# EAGLE board fuitsu (EAGLE 6.5.0)
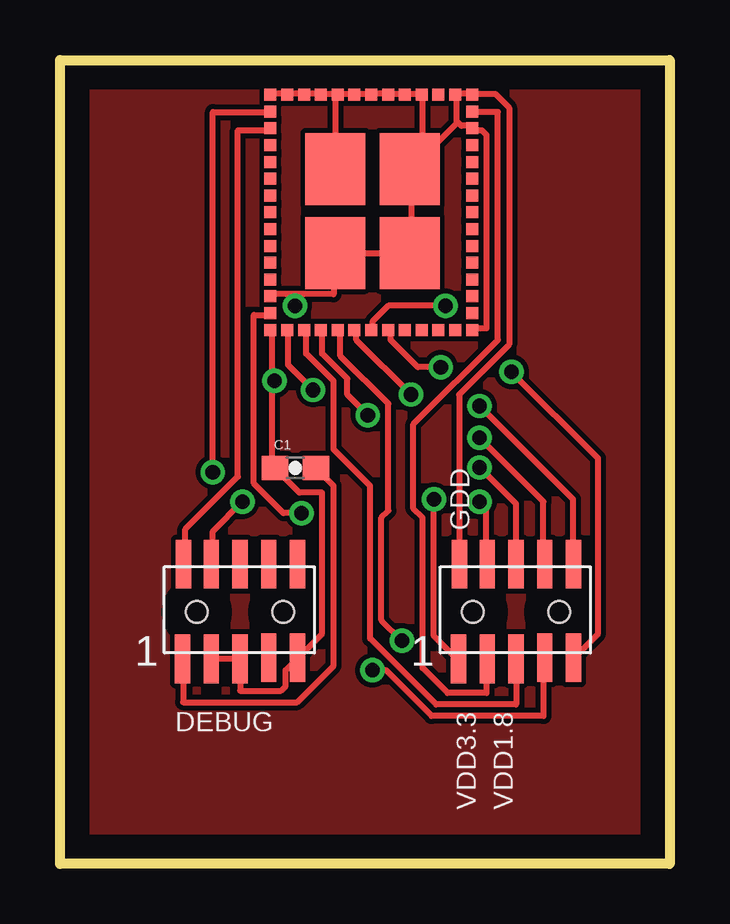
[diagram p0: board, top side]
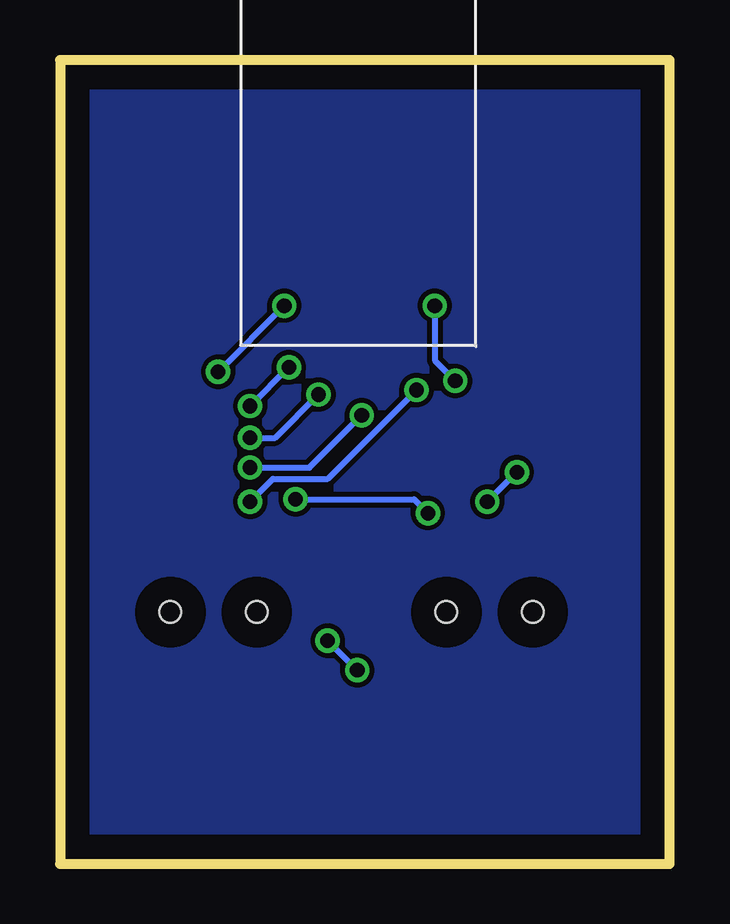
[diagram p1: board, bottom side, seen from below]

Size 25.4 x 33.52 mm. Coordinates in mm from the lower left corner, seen from the top.
Outline: 0,33.52 25.4,33.52 25.4,0 0,0 0,33.52
Copper layers (1*16): Top 0.035mm / dielectric 1.5mm / Bottom 0.035mm
Design rules "default": minimum track width 10mil, minimum drill 24mil, track to track 8mil, track to pad 8mil, pad to pad 8mil, via to via 8mil, smd to smd 8mil, copper to edge 40mil, drill to drill 8mil, minimum pad ring 10mil, minimum via ring 8mil, stop-mask expansion 4mil, vias tented up to drill 0mil, thermal gap 10mil

## Footprints (pad centres in the part's own frame; a part is rotated, then mirrored left to right if it is on the bottom)
0603-CAP = smd 1.1 x 1: 1 -0.85,0; 2 0.85,0
FUJITSU-MBH7BLZ02 = smd 0.5 x 0.5: 1 4.9,-4.2; 2 4.2,-4.2; 3 3.5,-4.2; 4 2.8,-4.2; 5 2.1,-4.2; 6 1.4,-4.2; 7 0.7,-4.2; 8 0,-4.2; 9 -0.7,-4.2; 10 -1.4,-4.2; 11 -2.1,-4.2; 12 -2.8,-4.2; 13 -3.5,-4.2; 14 -4.2,-4.2; 15 -4.9,-4.2; 16 -4.9,-3.5; 17 -4.9,-2.8; 18 -4.9,-2.1; 19 -4.9,-1.4; 20 -4.9,-0.7; 21 -4.9,0; 22 -4.9,0.7; 23 -4.9,1.4; 24 -4.9,2.1; 25 -4.9,2.8; 26 -4.9,3.5; 27 -4.9,4.2; 28 -4.2,4.2; 29 -3.5,4.2; 30 -2.8,4.2; 31 -2.1,4.2; 32 -1.4,4.2; 33 -0.7,4.2; 34 0,4.2; 35 0.7,4.2; 36 1.4,4.2; 37 2.1,4.2; 38 2.8,4.2; 39 3.5,4.2; 40 4.2,4.2; 41 4.9,4.2; 42 4.9,3.5; 43 4.9,2.8; 44 4.9,2.1; 45 4.9,1.4; 46 4.9,0.7; 47 4.9,0; 48 4.9,-0.7; 49 4.9,-1.4; 50 4.9,-2.1; 51 4.9,-2.8; 52 4.9,-3.5 | smd 3 x 2.5: 53 1.8,-1.6; 54 -1.7,-1.6; 55 1.8,1.5; 56 -1.7,1.5
PIN-HEADER-SMT(1.27MM)2X5 = smd 0.635 x 2.032: 1 -2.4,-1.95; 2 -2.35,2; 3 -1.2,-1.95; 4 -1.2,2; 5 0,-1.95; 6 0,2; 7 1.2,-1.9; 8 1.2,2; 9 2.4,-1.9; 10 2.4,2 | hole 0.9: 1.8,0; -1.8,0

## Placement (x,y rotation side)
C1  10μ  [0603-CAP]  9.81,16.51 0 top
U$1  FUJITSU-MBH7BLZ02  [FUJITSU-MBH7BLZ02]  12.97,27.17 90 top
U$2  PIN-HEADER-SMT(1.27MM)2X5  [PIN-HEADER-SMT(1.27MM)2X5]  7.5,10.5 0 top
U$3  PIN-HEADER-SMT(1.27MM)2X5  [PIN-HEADER-SMT(1.27MM)2X5]  19,10.5 0 top

## Library data of the parts
C1 = SparkFun
U$1 = blegadget20140308
U$2 U$3 = gclue

## Nets
3.3V: C1.2 U$2.1
GIPO_18: U$1.6
GND: C1.1 U$1.1 U$1.3 U$1.15 U$1.27 U$1.29 U$1.41 U$1.42 U$1.43 U$1.44 U$1.45 U$1.46 U$1.47 U$1.48 U$1.49 U$1.50 U$1.52 U$1.53 U$1.54 U$1.55 U$1.56 U$2.3 U$2.5 U$2.9 U$3.2
GPIO_0: U$1.26 U$3.4
GPIO_1: U$1.25 U$3.5
GPIO_2: U$1.24 U$3.6
GPIO_3: U$1.23 U$3.7
GPIO_4: U$1.22 U$3.8
GPIO_5: U$1.21 U$3.9
GPIO_6: U$1.20 U$3.10
GPIO_7: U$1.34
GPIO_8: U$1.35
GPIO_9: U$1.36
GPIO_10: U$1.37
GPIO_11: U$1.38
GPIO_12: U$1.12
GPIO_13: U$1.11
GPIO_14: U$1.10
GPIO_15: U$1.9
GPIO_16: U$1.8
GPIO_17: U$1.4
GPIO_19: U$1.5
GPIO_20: U$1.7
GPIO_21: U$1.16
GPIO_22: U$1.17
GPIO_23: U$1.18
GPIO_24: U$1.19
GPIO_25: U$1.30
GPIO_26: U$1.14
GPIO_27: U$1.13
GPIO_28: U$1.32
GPIO_29: U$1.31
GPIO_30: U$1.33
SWDCLK: U$1.40 U$2.4
SWDIO: U$1.39 U$2.2
VDD: U$1.28 U$3.1
VDD1.8: U$1.2 U$3.3

## Tracks (layer width: path | path; a pad name or v marks a point on that pad's centre or on a via)
3.3V
  Top 0.254: C1.2 11.4,15.77 11.4,8.27 9.88,6.75 5.13,6.75 5.13,8.55 U$2.1
BGND
  pour Top: 0,33.5 25.5,33.5 25.5,0 0,0
GND  (via drill 0.61)
  Top 0.254: 8.84,20.14 8.84,16.62 8.93,16.53 C1.1 9.03,16.43 9.97,15.48 10.93,15.48 10.93,9.6 9.97,8.64 U$2.9 9.88,8.55 9.4,8.07 9.4,7.41 9.21,7.22 7.5,7.22 7.5,8.46 U$2.5 U$2.3 | 8.84,20.14 8.84,22.23 U$1.27 | 9.79,23.75 11.4,23.75 11.4,25.46 U$1.56 11.59,25.46 14.54,25.46 U$1.54 14.63,25.55 14.63,28.88 U$1.53 | 9.79,23.75 8.84,23.75 U$1.29 | U$1.41 8.84,32.11 9.4,32.11 U$1.42 9.5,32.11 10.07,32.11 U$1.43 10.26,32.11 10.83,32.11 U$1.44 10.93,32.11 11.49,32.11 U$1.45 | U$1.45 11.69,32.11 12.26,32.11 U$1.46 12.35,32.11 12.92,32.11 U$1.47 13.02,32.11 13.59,32.11 U$1.48 13.78,32.11 14.35,32.11 U$1.49 14.44,32.11 15.01,32.11 U$1.50 15.11,32.02 15.11,29.55 U$1.53 | U$1.45 11.49,32.02 11.49,28.98 U$1.55 | U$1.15 17.2,22.32 17.77,22.32 17.77,30.4 17.57,30.59 17.2,30.59 U$1.3 17.1,30.78 16.72,30.78 16.53,30.97 | 16.53,30.97 16.53,32.02 U$1.52 16.53,32.11 17.1,32.11 U$1.1 17.29,32.11 18.14,32.11 18.71,31.54 18.71,21.66 16.62,19.57 16.62,12.54 U$3.2 | U$1.53 14.63,28.98 16.53,30.88 16.53,30.97 | 9.79,23.75 v9.79,23.27 | v8.93,20.14 8.84,20.14
  Bottom 0.254: v8.93,20.14 9.79,21 v9.79,23.27
GPIO_0  (via drill 0.61)
  Top 0.254: v10.54,19.76 9.5,20.8 9.5,22.23 U$1.26 | v17.48,15.11 17.77,14.82 17.77,12.54 U$3.4
  Bottom 0.254: v10.54,19.76 14.25,16.05 16.53,16.05 v17.48,15.11
GPIO_1
  Top 0.254: U$3.5 19,6.65 15.68,6.65 12.92,9.4 12.92,15.77 11.4,17.29 11.4,20.14 10.26,21.28 10.26,22.23 U$1.25
GPIO_2  (via drill 0.61)
  Top 0.254: v12.82,18.71 11.97,19.57 11.97,20.23 10.93,21.28 10.93,22.23 U$1.24 | v17.48,16.53 19,15.01 U$3.6
  Bottom 0.254: v12.82,18.71 15.01,16.53 v17.48,16.53
GPIO_3  (via drill 0.61)
  Top 0.254: v14.25,9.31 13.39,10.16 13.39,14.44 13.68,14.72 13.68,19.19 11.69,21.18 11.69,22.14 11.59,22.23 U$1.23 | v13.02,8.07 13.59,8.07 15.48,6.17 20.14,6.17 20.14,8.55 U$3.7
  Bottom 0.254: v13.02,8.07 v14.25,9.31
GPIO_4  (via drill 0.61)
  Top 0.254: v14.63,19.57 12.35,21.85 12.35,22.23 U$1.22 | v17.48,17.77 20.14,15.11 20.14,12.54 U$3.8
  Bottom 0.254: v14.63,19.57 16.43,17.77 v17.48,17.77
GPIO_5  (via drill 0.61)
  Top 0.254: v16.05,23.27 13.68,23.27 13.02,22.61 13.02,22.32 U$1.21 | v18.81,20.52 22.42,16.91 22.42,9.6 21.47,8.64 U$3.9
  Bottom 0.254: v18.81,20.52 v16.05,23.27
GPIO_6  (via drill 0.61)
  Top 0.254: v15.87,20.71 14.91,20.71 13.78,21.85 13.78,22.14 13.68,22.23 U$1.20 | v17.48,19.09 21.38,15.2 21.38,12.54 U$3.10
  Bottom 0.254: v17.48,19.09 v15.87,20.71
N$1
  pour Bottom: 0,33.5 25.5,33.5 25.5,0 0,0
SWDCLK  (via drill 0.61)
  Top 0.254: v6.37,16.34 6.37,31.35 8.74,31.35 U$1.40 | v7.6,15.11 6.37,13.87 6.37,12.54 U$2.4
  Bottom 0.254: v7.6,15.11 v6.37,16.34
SWDIO
  Top 0.254: U$1.39 8.74,30.59 7.41,30.59 7.41,16.15 5.22,13.96 5.22,12.54 U$2.2
VDD  (via drill 0.61)
  Top 0.254: v10.07,14.63 9.31,14.63 8.07,15.87 8.07,22.89 8.74,22.89 U$1.28 | v15.58,15.2 15.58,9.5 16.53,8.55 U$3.1
  Bottom 0.254: v10.07,14.63 10.64,15.2 v15.58,15.2
VDD1.8
  Top 0.254: U$1.2 17.2,31.35 18.24,31.35 18.24,21.85 14.72,18.34 14.72,14.82 15.11,14.44 15.11,8.17 16.15,7.12 17.77,7.12 17.77,8.55 U$3.3

## Text on the board
tNames: GDD | DEBUG | VDD3.3 | VDD1.8